# Altium PCB JacdacBreadboardRingsWasherG 109 oblong.PcbDoc
Units mm, origin at the board's own origin, x right, y up, seen from the top; angles counter-clockwise.
Board outline 28.01 x 28.01 mm, 2 copper layers (Top Layer, Bottom Layer), stack 1.525 mm thick; 12 components, 3 nets, 49 pads, 0 vias.
Unrouted connection lines stored in the file: 12.
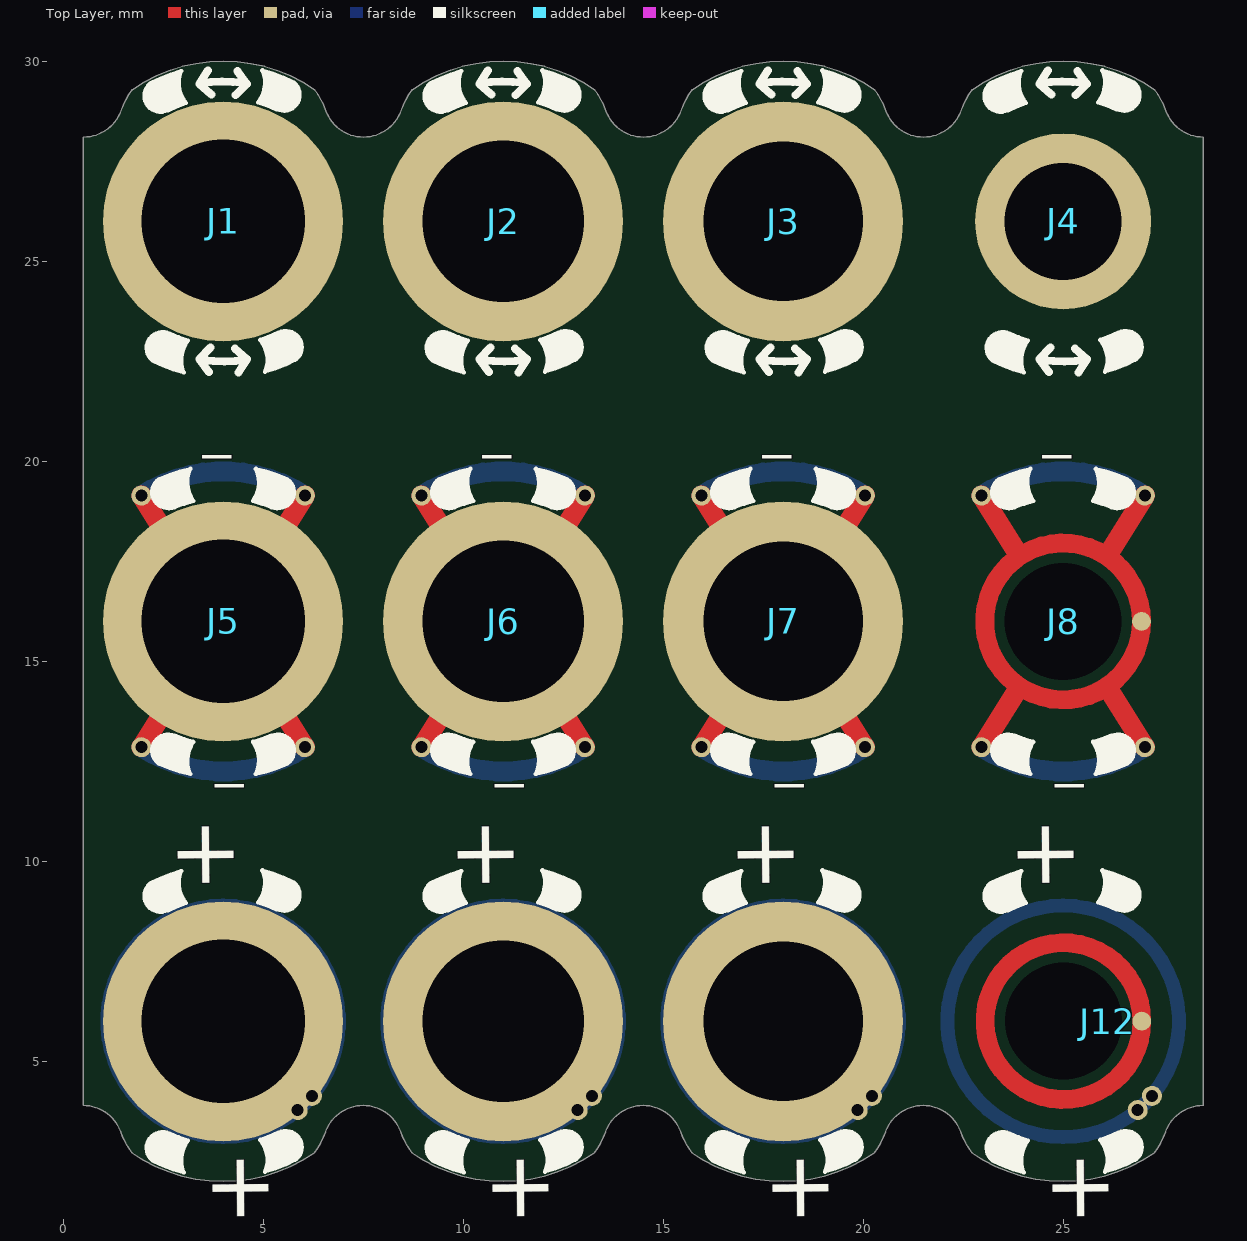
[diagram p0: Top Layer view]
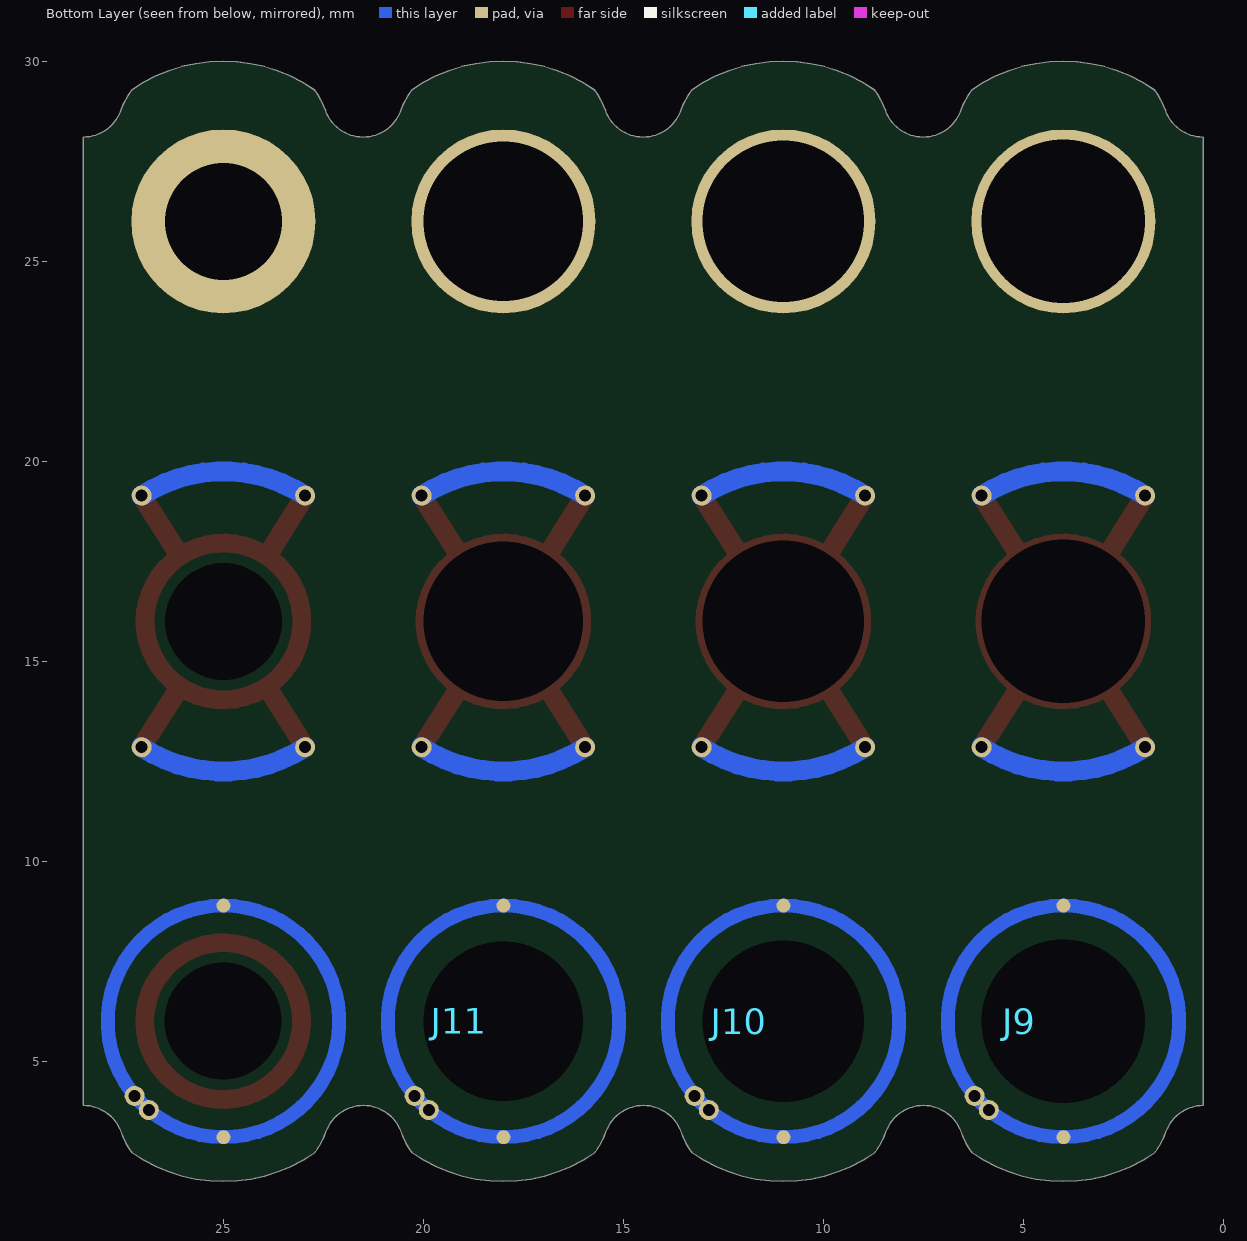
[diagram p1: Bottom Layer view, seen from below]

## Layer stack, top to bottom
Top Solder: solder mask 0.0102, Solder Resist, Dk 3.5
Top Layer: signal copper 0.0356
Dielectric 1: core 1.454, FR-4, Dk 4.2
Bottom Layer: signal copper 0.0356
Bottom Solder: solder mask 0.0102, Solder Resist, Dk 3.5

## Board outline
1.44,3.242 ccw(c3.326,3.907) 1.722,2.712 ccw(c4,6) 6.278,2.712 ccw(c4.674,3.907) 6.56,3.242 cw(c7.5,2.9) 7.5,3.9 cw(c7.5,2.9) 8.44,3.242 ccw(c10.326,3.907) 8.722,2.712 ccw(c11,6) 13.278,2.712 ccw(c11.674,3.907) 13.56,3.242 cw(c14.5,2.9) 14.5,3.9 cw(c14.5,2.9) 15.44,3.242 ccw(c17.326,3.907) 15.722,2.712 ccw(c18,6) 20.278,2.712 ccw(c18.674,3.907) 20.56,3.242 cw(c21.5,2.9) 21.5,3.9 cw(c21.5,2.9) 22.44,3.242 ccw(c24.326,3.907) 22.722,2.712 ccw(c25,6) 27.278,2.712 ccw(c25.674,3.907) 27.56,3.242 cw(c28.5,2.9) 28.5,3.9 28.5,28.108 28.508,28.108 cw(c28.508,29.108) 27.568,28.766 ccw(c25.682,28.101) 27.285,29.296 ccw(c25.008,26.008) 22.73,29.296 ccw(c24.334,28.101) 22.447,28.766 cw(c21.508,29.108) 21.508,28.108 cw(c21.508,29.108) 20.568,28.766 ccw(c18.682,28.101) 20.285,29.296 ccw(c18.008,26.008) 15.73,29.296 ccw(c17.334,28.101) 15.447,28.766 cw(c14.508,29.108) 14.508,28.108 cw(c14.508,29.108) 13.568,28.766 ccw(c11.682,28.101) 13.285,29.296 ccw(c11.008,26.008) 8.73,29.296 ccw(c10.334,28.101) 8.447,28.766 cw(c7.508,29.108) 7.508,28.108 cw(c7.508,29.108) 6.568,28.766 ccw(c4.682,28.101) 6.285,29.296 ccw(c4.008,26.008) 1.73,29.296 ccw(c3.334,28.101) 1.447,28.766 cw(c0.508,29.108) 0.508,28.108 0.5,28.1 0.5,3.9 cw(c0.5,2.9)

## Design rules (kind name [scope] priority, off if disabled: settings)
AssemblyTestPointUsage [All] p1: valid=2
BoardOutlineClearance [All] p1: gap=0.3 ignorepadtopadclearanceinfootprint=FALSE except(0: Arc-OutlineEdge Arc-SplitContinuation Track-OutlineEdge Track-SplitContinuation SMDPad-OutlineEdge SMDPad-SplitContinuation THPad-OutlineEdge THPad-SplitContinuation Via-OutlineEdge Via-SplitContinuation Fill-SplitContinuation Poly-SplitContinuation Region-OutlineEdge Region-SplitContinuation Text-OutlineEdge Text-SplitContinuation; 0.2: Fill-OutlineEdge Poly-OutlineEdge Region-CavityEdge Region-CutoutEdge Region-SplitBarrior Text-CavityEdge Text-CutoutEdge Text-SplitBarrior)
Clearance [All] p1: gap=0.13 ignorepadtopadclearanceinfootprint=FALSE
ComponentClearance MH5.0KeepoutaAreaClearance [InComponent('MH1') or InComponent('MH2')  or InComponent('MH3') or InComponent('MH4') vs InComponent('D6') or InComponent('D7') or InComponent('D8') or InComponent('D9') or InComponent('D10') or InComponent('D11') or InComponent('D12') or InComponent('D13') or InComponent('C6') or InComponent('C7') or InComponent('C8')  or  InComponent('C9') or  InComponent('C12')] p1: gap=0 collisioncheckmode=3 verticalgap=0 showdistances=FALSE
ComponentClearance [All] p2: gap=0.2 collisioncheckmode=3 verticalgap=0.2 showdistances=FALSE
DiffPairsRouting [All] p1: maxlimit=2 minlimit=0.15 mostfreqgap=0.15 toplayer_minwidth=0.15 toplayer_maxwidth=2 toplayer_prefwidth=0.15 bottomlayer_minwidth=0.15 bottomlayer_maxwidth=2 bottomlayer_prefwidth=0.15 maxuncoupledlength=25
FabricationTestPointUsage [All] p1: valid=2 allowmultiple=FALSE
HoleSize [All] p1: absolutevalues=TRUE maxlimit=5 minlimit=0.15 maxpercent=80.000 minpercent=20.000
HoleToHoleClearance [All] p1: gap=0.2 allowstackedmicrovias=TRUE
MinimumSolderMaskSliver [All] p1: minsoldermaskwidth=0.005
PlaneClearance [All] p1: clearance=0.2
PlaneConnect [All] p1: planeconnectstyle=Relief reliefexpansion=0.5 reliefentries=4 reliefconductorwidth=0.2 reliefairgap=0.3
PolygonConnect [All] p1: connectstyle=Direct reliefconductorwidth=0.2 reliefentries=4 polygonreliefangle="90 Angle" airgapwidth=0.2
RoutingVias RoutingVias_Power [InNetClass('Power')] p1: holewidth=0.4 width=0.8 viastyle="Through Hole" minholewidth=0.3 minwidth=0.6 maxholewidth=0.4 maxwidth=1
RoutingVias [All] p2: holewidth=0.3 width=0.6 viastyle="Through Hole" minholewidth=0.3 minwidth=0.6 maxholewidth=0.3 maxwidth=0.8
SilkToSilkClearance [All] p1: silktosilkclearance=0.001
SilkToSolderMaskClearance [IsPad] p1: minsilkscreentomaskgap=0.05 clearancetoexposedcopper=TRUE
SolderMaskExpansion [All] p1: expansion=0.075 istentingtop=FALSE
UnRoutedNet [All] p1: checkbadconnections=TRUE
ViasUnderSMD [not ( HasFootprint('JACDAC_EDGE_CONNECTOR_NO_TRACES') or HasFootprint('JACDAC_EDGE_CONNECTOR_NO_TRACES_CABLE_GUIDE') )] p1: allowed=FALSE
Width Width_Power [InNetClass('Power')] p1: maxlimit=1 minlimit=0.2 preferedwidth=0.5
Width [All] p2: maxlimit=1 minlimit=0.13 preferedwidth=0.13 minimp=50.000000 maximp=50.000000 favimp=50.000000
18 further rules are at their usual default settings.

## Components (designator, comment, footprint, x,y, rotation, side; value= is the part's Value field where it differs from the comment)
J1 "Jacdac EC30 1mm-bush-washer JD_DATA" "jacdac ec30-8 1mm-bush-washer-o pin1" 4,26 r0 top
J2 "Jacdac EC30 4mm-bush-washer JD_DATA" "jacdac ec30-8 4mm-bush-washer-o pin1" 11,26 r0 top
J3 "Jacdac EC30 8mm-bush-washer JD_DATA" "jacdac ec30-8 8mm-bush-washer-o pin1" 18,26 r0 top
J4 "Jacdac EC30 fr4-washer JD_DATA" "JACDAC EC30-8 FR4-WASHER-O PIN1" 25,26 r0 top
J5 "Jacdac EC30 1mm-bush-washer GND" "jacdac ec30-8 1mm-bush-washer-o pin2 jlc" 4,16 r0 top
J6 "Jacdac EC30 4mm-bush-washer GND" "jacdac ec30-8 4mm-bush-washer-o pin2 jlc" 11,16 r0 top
J7 "Jacdac EC30 8mm-bush-washer GND" "jacdac ec30-8 8mm-bush-washer-o pin2 jlc" 18,16 r0 top
J8 "Jacdac EC30 fr4-washer GND" "JACDAC EC30-8 FR4-WASHER-O PIN2 JLC" 25,16 r0 top
J9 "Jacdac EC30 1mm-bush-washer JD_PWR" "jacdac ec30-8 1mm-bush-washer-o pin3 jlc" 4,6 r0 top
J10 "Jacdac EC30 4mm-bush-washer JD_PWR" "jacdac ec30-8 4mm-bush-washer-o pin3 jlc" 11,6 r0 top
J11 "Jacdac EC30 8mm-bush-washer JD_PWR" "jacdac ec30-8 8mm-bush-washer-o pin3 jlc" 18,6 r0 top
J12 "Jacdac EC30 fr4-washer JD_PWR" "JACDAC EC30-8 FR4-WASHER-O PIN3 JLC" 25,6 r0 top

## Footprints (in the part's own frame and the unit in brackets; to place one, negate y for a bottom-side part, rotate by r counter-clockwise, add the part's x,y. Pads: shape width x height; smd on the part's side, far side on the other; paste and mask are expansions set on the pad)
"jacdac ec30-8 1mm-bush-washer-o pin1" [mm]
  round 6 / inner round 0 / far side round 4.6 hole 4.09 mask+0: 1(0,0)
  silkscreen extent -1.97,-3.78 1.97,3.78, body extent -3,-3.88 3,3.88, height 1
"jacdac ec30-8 1mm-bush-washer-o pin2 jlc" [mm]
  round 0.5 hole 0.3 mask+0: 2(-2.042,-3.145) 2(-2.042,3.145) 2(2.042,-3.145) 2(2.042,3.145)
  round 6 / inner round 0 / far side round 0 hole 4.09 unplated mask+0: 2(0,0)
  round 0.47 smd paste-1 mask+0: 2(1.96,0)
  Top Layer circle w0.47: c0,0 r1.96
  Top Layer lines w0.5: -2.042,-3.145 -1.191,-1.79 ; -2.042,3.145 -1.191,1.79 ; 1.191,-1.79 2.042,-3.145 ; 1.191,1.79 2.042,3.145
  Bottom Layer lines w0.5: -2.042,-3.145 ccw(c0,0) 2.042,-3.145 ; -2.042,3.145 cw(c0,0) 2.042,3.145
  silkscreen extent -1.77,-3.82 1.77,3.82, body extent -3,-4 3,4, height 1
"jacdac ec30-8 1mm-bush-washer-o pin3 jlc" [mm]
  round 0.35 smd far side paste-1 mask+0: 3(0,-2.895) 3(0,2.895)
  round 6 / inner round 0 / far side round 0 hole 4.09 unplated paste+0 mask+0: 3(0,0)
  round 0.5 hole 0.3 mask+0: 3(1.865,-2.215) 3(2.219,-1.862)
  Bottom Layer lines w0.35: 0,-2.895 cw(c0,0) 0,2.895 cw(c0,0) 0,-2.895
  silkscreen extent -1.97,-3.78 1.97,3.78, body extent -3.06,-4.03 3.07,4.04, height 1
"jacdac ec30-8 4mm-bush-washer-o pin1" [mm]
  round 6 / inner round 0 / far side round 4.6 hole 4.04 mask+0: 1(0,0)
  silkscreen extent -1.97,-3.78 1.97,3.78, body extent -3,-3.88 3,3.88, height 4
"jacdac ec30-8 4mm-bush-washer-o pin2 jlc" [mm]
  round 0.5 hole 0.3 mask+0: 2(-2.042,-3.145) 2(-2.042,3.145) 2(2.042,-3.145) 2(2.042,3.145)
  round 6 / inner round 0 / far side round 0 hole 4.04 unplated mask+0: 2(0,0)
  round 0.47 smd paste-1 mask+0: 2(1.96,0)
  Top Layer circle w0.47: c0,0 r1.96
  Top Layer lines w0.5: -2.042,-3.145 -1.191,-1.79 ; -2.042,3.145 -1.191,1.79 ; 1.191,-1.79 2.042,-3.145 ; 1.191,1.79 2.042,3.145
  Bottom Layer lines w0.5: -2.042,-3.145 ccw(c0,0) 2.042,-3.145 ; -2.042,3.145 cw(c0,0) 2.042,3.145
  silkscreen extent -1.77,-3.82 1.77,3.82, body extent -3,-4 3,4, height 4
"jacdac ec30-8 4mm-bush-washer-o pin3 jlc" [mm]
  round 0.35 smd far side paste-1 mask+0: 3(0,-2.895) 3(0,2.895)
  round 6 / inner round 0 / far side round 0 hole 4.04 unplated paste+0 mask+0: 3(0,0)
  round 0.5 hole 0.3 mask+0: 3(1.865,-2.215) 3(2.219,-1.862)
  Bottom Layer lines w0.35: 0,-2.895 ccw(c0,0) 0,2.895 ccw(c0,0) 0,-2.895
  silkscreen extent -1.97,-3.78 1.97,3.78, body extent -3.06,-4.03 3.07,4.04, height 4
"jacdac ec30-8 8mm-bush-washer-o pin1" [mm]
  round 6 / inner round 0 / far side round 4.6 hole 3.99 mask+0: 1(0,0)
  silkscreen extent -1.97,-3.78 1.97,3.78, body extent -3,-3.88 3,3.88, height 8
"jacdac ec30-8 8mm-bush-washer-o pin2 jlc" [mm]
  round 0.5 hole 0.3 mask+0: 2(-2.042,-3.145) 2(-2.042,3.145) 2(2.042,-3.145) 2(2.042,3.145)
  round 6 / inner round 0 / far side round 0 hole 3.99 unplated mask+0: 2(0,0)
  round 0.47 smd paste-1 mask+0: 2(1.96,0)
  Top Layer circle w0.47: c0,0 r1.96
  Top Layer lines w0.5: -2.042,-3.145 -1.191,-1.79 ; -2.042,3.145 -1.191,1.79 ; 1.191,-1.79 2.042,-3.145 ; 1.191,1.79 2.042,3.145
  Bottom Layer lines w0.5: -2.042,-3.145 ccw(c0,0) 2.042,-3.145 ; -2.042,3.145 cw(c0,0) 2.042,3.145
  silkscreen extent -1.77,-3.82 1.77,3.82, body extent -3,-4 3,4, height 8
"jacdac ec30-8 8mm-bush-washer-o pin3 jlc" [mm]
  round 0.35 smd far side paste-1 mask+0: 3(0,-2.895) 3(0,2.895)
  round 6 / inner round 0 / far side round 0 hole 3.99 unplated paste+0 mask+0: 3(0,0)
  round 0.5 hole 0.3 mask+0: 3(1.865,-2.215) 3(2.219,-1.862)
  Bottom Layer lines w0.35: 0,-2.895 cw(c0,0) 0,2.895 cw(c0,0) 0,-2.895
  silkscreen extent -1.97,-3.78 1.97,3.78, body extent -3.06,-4.03 3.07,4.04, height 8
"JACDAC EC30-8 FR4-WASHER-O PIN1" [mm]
  round 4.4 / inner round 0 / far side round 4.6 hole 2.93 mask+0: 1(0,0)
  silkscreen extent -1.97,-3.78 1.97,3.78, body extent -1.98,-3.88 1.98,3.88, height 0.01
"JACDAC EC30-8 FR4-WASHER-O PIN2 JLC" [mm]
  round 0.5 hole 0.3 mask+0: 2(-2.042,-3.145) 2(-2.042,3.145) 2(2.042,-3.145) 2(2.042,3.145)
  round 0 hole 2.93 unplated mask+0.6: 2(0,0)
  round 0.47 smd paste-1 mask+0: 2(1.96,0)
  Top Layer circle w0.47: c0,0 r1.96
  Top Layer lines w0.5: -2.042,-3.145 -1.191,-1.79 ; -2.042,3.145 -1.191,1.79 ; 1.191,-1.79 2.042,-3.145 ; 1.191,1.79 2.042,3.145
  Bottom Layer lines w0.5: -2.042,-3.145 ccw(c0,0) 2.042,-3.145 ; -2.042,3.145 cw(c0,0) 2.042,3.145
  silkscreen extent -1.77,-3.82 1.77,3.82, body extent -2.3,-4 2.3,4, height 0.05
"JACDAC EC30-8 FR4-WASHER-O PIN3 JLC" [mm]
  round 0.35 smd far side paste-1 mask+0: 3(0,-2.895) 3(0,2.895)
  round 0 hole 2.93 unplated mask+0.6: 3(0.008,0.008)
  round 0.5 hole 0.3 mask+0: 3(1.865,-2.215) 3(2.219,-1.862)
  round 0.47 smd paste-1 mask+0: 3(1.968,0.008)
  Top Layer circle w0.47: c0.008,0.008 r1.96
  Bottom Layer lines w0.35: 0,-2.895 ccw(c0,0) 0,2.895 ccw(c0,0) 0,-2.895
  silkscreen extent -1.97,-3.78 1.97,3.78, body extent -3.06,-4.03 3.07,4.04, height 0.05

## Part data
J1 J5 J9: Supplier Part Number 1=C2915632, Diameter=M3, Standoff Height=1mm, Supplier 1=LCSC
J2 J6 J10: Supplier Part Number 1=C2915635, Diameter=M3, Standoff Height=4mm, Supplier 1=LCSC, Supplier 2=LCSC, Supplier Part Number 2=C2916382
J3 J7 J11: Supplier Part Number 1=C2916369, Diameter=M3, Standoff Height=8mm, Supplier 1=LCSC, Supplier 2=LCSC, Supplier Part Number 2=C2916368
J4 J12: Manufacturer 1=Sinhoo, Manufacturer Part Number 1=SMTSO3080, Supplier Part Number 1=C2916369, ComponentLink1Description="Online datasheet", ComponentLink1URL=https://datasheet.lcsc.com/lcsc/2111221830_Sinhoo-SMTSO3080CTJ_C2916369.pdf, Hole Clearance=7.0mm, Hole Size=M3, Supplier 1=LCSC
J8: ComponentLink1Description="Online datasheet", ComponentLink1URL=https://datasheet.lcsc.com/lcsc/2111221830_Sinhoo-SMTSO3080CTJ_C2916369.pdf

## Nets (pads, with @x,y where several pads share a name; then routed paths per layer and width w, separated by ;. In a path a pad name is that pad's centre, name@x,y a point inside that pad or via, vN(x,y) a via of type N, cw(c..) or ccw(c..) an arc to the next point about the centre after c; other vN are vias at no path point)
GND: J5.2 J6.2 J7.2 J8.2
JD_DATA: J1.1 J2.1 J3.1 J4.1
JD_PWR: J9.3 J10.3 J11.3 J12.3

## Silkscreen, mask and mechanical layers (free items; w line width, h text height)
Alignment:
  lines w0.1: 0.5,3.9 cw(c0.5,2.9) 1.44,3.242 ccw(c3.326,3.907) 1.722,2.712 ccw(c4,6) 6.278,2.712 ccw(c4.674,3.907) 6.56,3.242 cw(c7.5,2.9) 7.5,3.9 cw(c7.5,2.9) 8.44,3.242 ccw(c10.326,3.907) 8.722,2.712 ccw(c11,6) 13.278,2.712 ccw(c11.674,3.907) 13.56,3.242 cw(c14.5,2.9) 14.5,3.9 cw(c14.5,2.9) 15.44,3.242 ccw(c17.326,3.907) 15.722,2.712 ccw(c18,6) 20.278,2.712 ccw(c18.674,3.907) 20.56,3.242 cw(c21.5,2.9) 21.5,3.9 cw(c21.5,2.9) 22.44,3.242 ccw(c24.326,3.907) 22.722,2.712 ccw(c25,6) 27.278,2.712 ccw(c25.674,3.907) 27.56,3.242 cw(c28.5,2.9) 28.5,3.9 ; 0.508,28.108 ccw(c0.508,29.108) 1.447,28.766 cw(c3.334,28.101) 1.73,29.296 cw(c4.008,26.008) 6.285,29.296 cw(c4.682,28.101) 6.568,28.766 ; 6.568,28.766 ccw(c7.508,29.108) 7.508,28.108 ccw(c7.508,29.108) 8.447,28.766 cw(c10.334,28.101) 8.73,29.296 cw(c11.008,26.008) 13.285,29.296 cw(c11.682,28.101) 13.568,28.766 ccw(c14.508,29.108) 14.508,28.108 ccw(c14.508,29.108) 15.447,28.766 cw(c17.334,28.101) 15.73,29.296 cw(c18.008,26.008) 20.285,29.296 cw(c18.682,28.101) 20.568,28.766 ccw(c21.508,29.108) 21.508,28.108 ccw(c21.508,29.108) 22.447,28.766 cw(c24.334,28.101) 22.73,29.296 cw(c25.008,26.008) 27.285,29.296 cw(c25.682,28.101) 27.568,28.766 ccw(c28.508,29.108) 28.508,28.108
  lines w0.2: 0.5,3.9 0.5,28.1 ; 28.5,3.9 28.5,28.108

## Text inside footprints (layer, text, board x,y; h text height)
J5: Top Overlay "-" at 3.649,13.24 h3.5 r180; Top Overlay "-" at 4.351,18.76 h3.5
J6: Top Overlay "-" at 10.649,13.24 h3.5 r180; Top Overlay "-" at 11.351,18.76 h3.5
J7: Top Overlay "-" at 18.351,18.76 h3.5; Top Overlay "-" at 17.649,13.24 h3.5 r180
J8: Top Overlay "-" at 25.351,18.76 h3.5; Top Overlay "-" at 24.65,13.24 h3.5 r180
J9: Top Overlay "+" at 4.516,8.928 h2.8 r0.5; Top Overlay "+" at 3.484,3.072 h2.8 r180.5
J10: Top Overlay "+" at 10.484,3.072 h2.8 r180.5; Top Overlay "+" at 11.516,8.928 h2.8 r0.5
J11: Top Overlay "+" at 18.516,8.928 h2.8 r0.5; Top Overlay "+" at 17.484,3.072 h2.8 r180.5
J12: Top Overlay "+" at 24.484,3.072 h2.8 r180.5; Top Overlay "+" at 25.516,8.928 h2.8 r0.5